# Altium PCB 矩形板V3.0.pcbdoc (part 1 of 2)
Units mm, origin at the board's own origin, x right, y up, seen from the top; angles counter-clockwise.
Board outline 153.8 x 190.94 mm, 2 copper layers (Top Layer, Bottom Layer); 146 components, 210 nets, 672 pads, 247 vias.
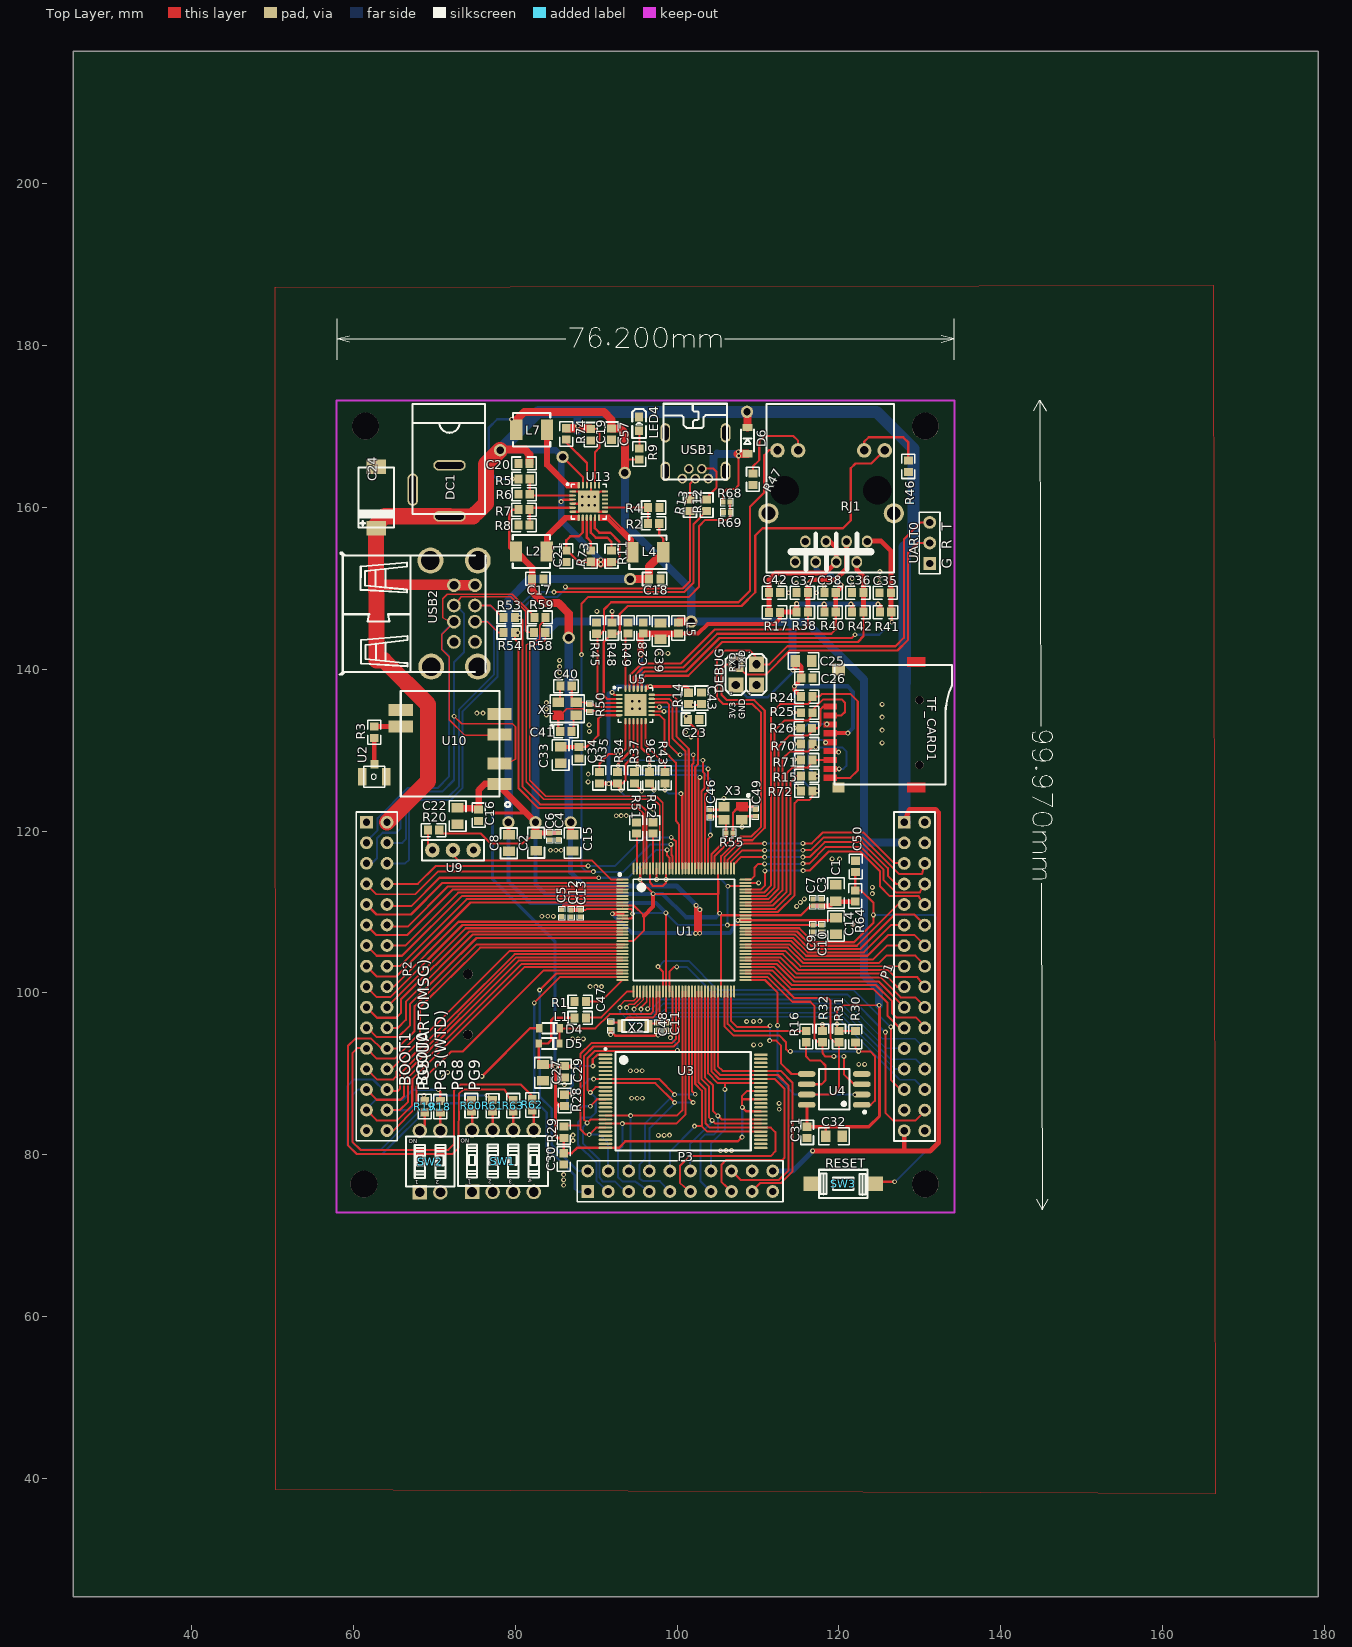
[diagram p0: Top Layer view]
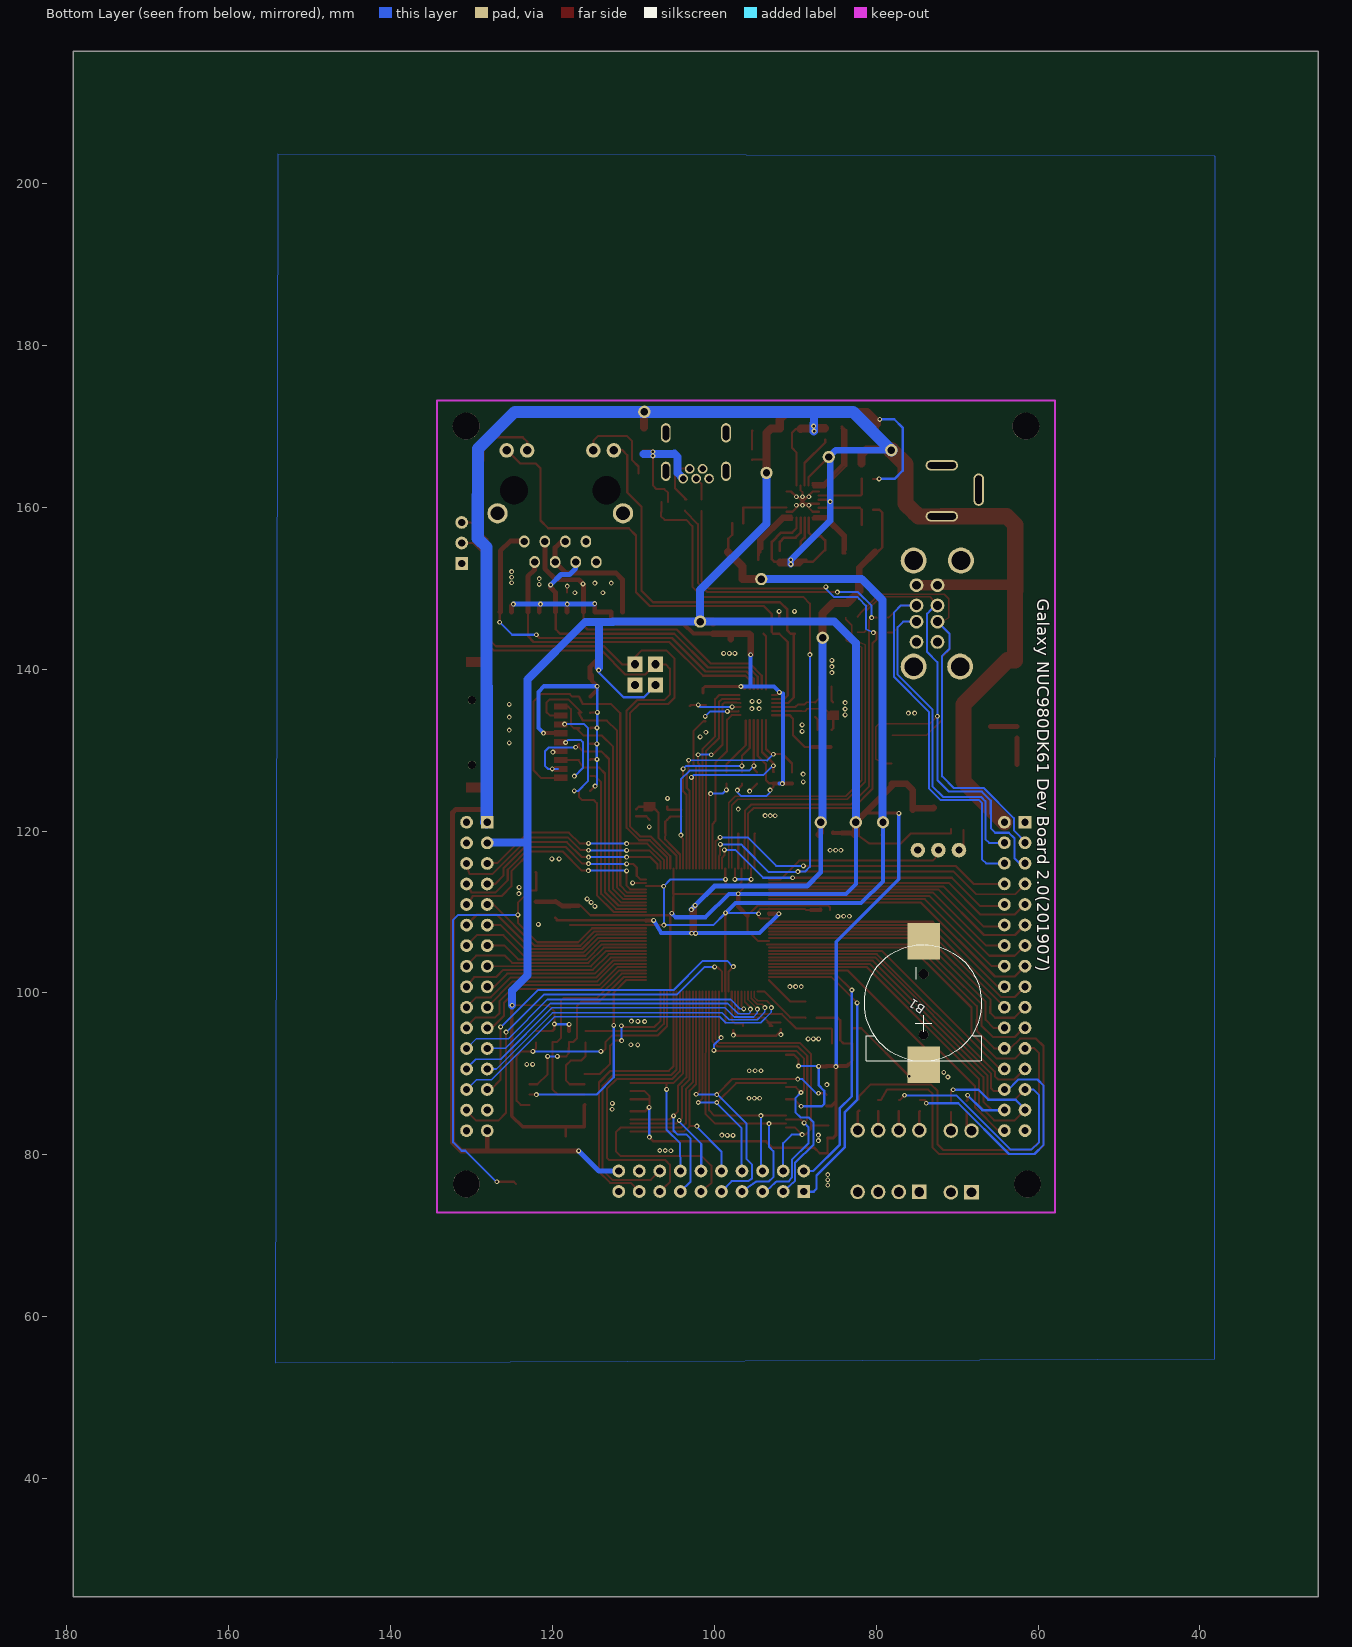
[diagram p1: Bottom Layer view, seen from below]

## Layer stack, top to bottom
Top Layer: signal copper (thickness not stored)
Dielectric: dielectric 0.32, FR-4, Dk 4.8
Bottom Layer: signal copper (thickness not stored)

## Board outline
179.197,25.4 25.4,25.4 25.4,216.338 179.197,216.338

## Components (designator, comment, footprint, x,y, rotation, side; value= is the part's Value field where it differs from the comment)
B1 "CR1220-2" BATTERY-2 74.141,98.749 r270 bottom
C1 "10uF" 0805 119.617,112.328 r270 top
C2 "10uF" 0805 82.583,118.56 r90 top
C3 "100nF" 0402 117.801,111.189 r270 top
C4 "100nF" 0402 85.341,119.369 r90 top
C5 "100nF" 0402 85.721,109.849 r90 top
C6 "100nF" 0402 84.261,119.349 r90 top
C7 "100nF" 0402 116.781,111.189 r270 top
C8 "10uF" 0805 79.221,118.505 r90 top
C9 "100nF" 0402 116.781,107.969 r90 top
C10 "100nF" 0402 117.861,107.969 r90 top
C11 "100nF" 0402 98.681,95.849 r90 top
C12 "100nF" 0402 86.901,109.829 r90 top
C13 "100nF" 0402 88.061,109.829 r90 top
C14 "10uF" 0805 119.641,108.269 r90 top
C15 "10uF" 0805 87.081,118.549 r90 top
C16 "100nF" 0603 75.481,121.959 r90 top
C17 "10uF" 0603 82.797,151.151 r180 top
C18 "22uF" 0603 97.227,151.141 r180 top
C19 "10uF" 0603 89.327,168.971 r90 top
C20 "10uF" 0603 81.089,165.418 r0 top
C21 "10uF" 0603 86.307,153.961 r90 top
C22 "10uF" 0805 72.881,121.849 r90 top
C23 "15pF" 0603 102.041,133.789 r180 top
C24 "470uF" CAP-T7343-D 62.811,161.199 r90 top
C25 "10uF" 0805 115.621,141.009 r180 top
C26 "100nF" 0603 116.041,138.889 r180 top
C27 "10uF" 0805 83.444,90.143 r90 top
C28 "100nF" 0603 95.821,145.089 r270 top
C29 "100nF" 0603 86.111,90.27 r270 top
C30 "100nF" 0603 86.001,79.489 r90 top
C31 "100nF" 0603 116.061,82.769 r270 top
C32 "10uF" 0805 119.391,82.293 r0 top
C33 "10uF" 0805 85.617,129.378 r270 top
C34 "100nF" 0603 87.867,129.678 r270 top
C35 "10pF" 0603 125.722,149.445 r180 top
C36 "10pF" 0603 122.33,149.456 r180 top
C37 "10pF" 0603 115.472,149.456 r180 top
C38 "10pF" 0603 118.901,149.456 r180 top
C39 "10uF" 0805 97.961,144.689 r270 top
C40 "22pF" 0603 86.281,137.909 r180 top
C41 "22pF" 0603 86.261,132.309 r180 top
C42 "22nF" 0603 112.043,149.456 r0 top
C43 "100nF" 0603 103.018,136.416 r270 top
C46 "15pF" 0402 104.081,122.209 r270 top
C47 "15pF" 0402 91.801,95.929 r90 top
C48 "15pF" 0402 97.641,95.839 r90 top
C49 "15pF" 0402 109.681,122.249 r90 top
C50 "1uF" 0603 122.067,115.628 r270 top
C57 "10uF" 0603 91.907,169.041 r90 top
D4 "1N4148WS T4" SOD-323 84.261,95.629 r0 top
D5 "1N4148WS T4" SOD-323 84.201,93.749 r0 top
D6 "DSK14" SOD-123 108.691,168.239 r270 top
DC1 "DC005-2.5MM" DC-5020 69.611,162.029 r270 top
DEBUG "4pin2x2" 4PINO 109.801,140.599 r270 top
L1 "0Ω" 0603 88.022,96.909 r0 top
L2 "1.5uH" L-SMD-4.1X4.6 81.997,154.531 r0 top
L4 "1uH" L-SMD-4.1X4.6 96.387,154.451 r180 top
L5 "0Ω" 0603 100.161,145.089 r270 top
L7 "1.5uH" L-SMD-4.1X4.6 82.027,169.581 r0 top
LED4 "KT-0603R" LED-0603 95.321,170.309 r270 top
P1 "Header-Female-2.54_2x16" HDR-16X2/2.54 130.601,100.759 r270 top
P2 "Header-Female-2.54_2x16" HDR-16X2/2.54 64.161,100.769 r270 top
P3 "Header-Female-2.54_2x10" HDR-10X2/2.54 100.381,76.729 r0 top
R1 "0" 0603 88.021,98.929 r0 top
R2 "100K" 0603 97.097,158.011 r0 top
R3 "0" 0603 62.581,132.209 r90 top
R4 "100K" 0603 97.107,159.971 r180 top
R5 "510K" 0603 81.097,163.511 r180 top
R6 "110K" 0603 81.097,161.606 r0 top
R7 "200K" 0603 81.089,159.703 r180 top
R8 "100K" 0603 81.089,157.798 r0 top
R9 "1K" 0603 95.321,166.579 r90 top
R11 "1K" 0603 91.897,153.951 r90 top
R12 "27" 0603 103.641,160.259 r270 top
R13 "27" 0603 101.591,160.259 r270 top
R14 "33" 0603 101.401,136.389 r90 top
R15 "0" 0603 116.021,126.819 r0 top
R16 "0" 0603 115.961,94.609 r90 top
R17 "0" 0603 112.031,147.019 r0 top
R18 "10K" 0603 70.751,85.949 r270 top
R19 "10K" 0603 68.821,85.959 r270 top
R20 "10K" 0603 69.911,120.109 r0 top
R24 "10K" 0603 116.021,136.599 r180 top
R25 "10K" 0603 116.021,134.619 r180 top
R26 "10K" 0603 115.981,132.699 r180 top
R28 "100K" 0603 86.111,86.714 r270 top
R29 "100K" 0603 86.017,82.778 r90 top
R30 "10K" 0603 122.021,94.589 r90 top
R31 "10K" 0603 120.001,94.609 r90 top
R32 "10K" 0603 117.961,94.609 r90 top
R34 "4.7K" 0603 92.661,126.589 r90 top
R35 "4.7K" 0603 90.401,126.569 r90 top
R36 "4.7K" 0603 96.581,126.589 r90 top
R37 "4.7K" 0603 94.721,126.569 r90 top
R38 "49.9" 0603 115.472,147.043 r180 top
R40 "49.9" 0603 118.901,147.043 r180 top
R41 "49.9" 0603 125.759,147.043 r180 top
R42 "49.9" 0603 122.33,147.043 r180 top
R43 "510" 0603 98.501,126.589 r90 top
R45 "10K" 0603 90.06,145.08 r270 top
R46 "470" 0603 128.571,165.059 r90 top
R47 "470" 0603 109.371,163.459 r90 top
R48 "10K" 0603 91.965,145.08 r270 top
R49 "12.1K" 0603 93.921,145.089 r270 top
R50 "1M" 0402 89.217,135.228 r90 top
R51 "12.1K" 0603 94.971,120.379 r270 top
R52 "12.1K" 0603 97.041,120.383 r270 top
R53 "4.7" 0603 79.251,146.389 r0 top
R54 "4.7" 0603 79.251,144.529 r0 top
R55 "1M" 0402 106.476,119.767 r180 top
R58 "4.7" 0603 83.011,144.549 r0 top
R59 "4.7" 0603 83.061,146.389 r0 top
R60 "10K" 0603 74.591,86.079 r270 top
R61 "10K" 0603 77.201,86.059 r270 top
R62 "10K" 0603 82.101,86.159 r270 top
R63 "10K" 0603 79.761,86.079 r270 top
R64 "100K" 0603 122.017,111.978 r270 top
R68 "20K" 0402 106.121,160.649 r180 top
R69 "39K" 0402 106.161,159.399 r0 top
R70 "10K" 0603 116.021,130.759 r180 top
R71 "10K" 0603 116.021,128.779 r180 top
R72 "10K" 0603 116.021,124.959 r180 top
R73 "1K" 0603 89.337,153.971 r90 top
R74 "1K" 0603 86.307,169.061 r90 top
RJ1 "HR911105A" RJ45-LIGHT 119.031,160.129 r180 top
SW1 "NDI-04H-V" NDI-04H-V 78.481,79.219 r0 top
SW2 "NDI-02H-V" NDI-02H-V 69.491,79.169 r0 top
SW3 "RESET" KEY-TOUCH-SMD-6.0*3.5*H-(A) 120.511,76.399 r0 top
TF_CARD1 "TF_CARD" TF-115_MRS 118.951,126.579 r0 top
U1 "NUC980DK61Y" LQFP-128_14X14X04P 100.841,107.789 r0 top
U2 "IPEX座-3P-φ2" IPEX座-3P-Φ2 63.921,125.409 r90 top
U3 "MT29F2G08ABAEAWP-IT:E" TSOP-48 100.751,86.609 r90 top
U4 "W25Q128JVSIQTR" SOIC-8_208MIL 119.411,88.079 r180 top
U5 "LAN8720AI" QFN-24_4X4X05P 94.861,135.589 r0 top
U9 "3pin插针" 3PIN插针 74.851,117.649 r180 top
U10 "usb wifi" "RTL8188CUS USB WIFI" 78.061,124.289 r180 top
U13 "EA3059C" QFN-24_4X4X05P 89.091,160.719 r0 top
UART0 "2.54排针 3pin" HDR-3X1/2.54 131.211,155.589 r90 top
USB1 "Mini USB-B 5P-Female-TH_C46398" USB-MINI-2 102.271,166.369 r180 top
USB2 "Double layer DIP 90° black" USB-M-51 72.451,146.869 r270 top
X1 "25MHz" OSC-YSX-3225_4P 86.421,135.109 r0 top
X2 "32.768KHz" SMD-3215_2P 94.801,95.909 r0 top
X3 "12MHz" OSC-YSX-3225_4P 106.901,122.209 r180 top
? "" ? 96.061,180.761 r0 top
? "" ? 145.141,123.219 r0 top

## Footprints (in the part's own frame and the unit in brackets; to place one, negate y for a bottom-side part, rotate by r counter-clockwise, add the part's x,y. Pads: shape width x height; smd on the part's side, far side on the other; paste and mask are expansions set on the pad)
3PIN插针 [mm]
  round 1.8 hole 0.9: 1(0,0) 2(2.54,0) 3(5.08,0)
  silkscreen extent -1.27,-1.27 6.35,1.27
4PINO [mil]
  rect 74x74 hole 40: a(0,0) b(100,0) c(0,-100) d(100,-100)
  silkscreen extent -50,-150 150,50
0402 [mm]
  rect 0.6x0.65 smd: 1(-0.424,0) 2(0.424,0)
  silkscreen extent -0.82,-0.43 0.81,0.43
0603 [mm]
  rect 1x1.1 smd: 1(-0.7,0) 2(0.7,0)
  silkscreen extent -1.5,-0.8 1.5,0.8
0805 [mm]
  rect 1.16x1.45 smd: 1(-1.016,0) 2(1.016,0)
  silkscreen extent -1.9,-1.03 1.87,1.04
BATTERY-2 [mm]
  round 1.2 hole 1.2: 0(-3.581,0) 0(3.912,0)
  rect 4.5x4 smd: 1(7.62,0) 2(-7.62,0)
  silkscreen extent -7.22,-7.3 7.22,7.14
CAP-T7343-D [mm]
  rect 1.8x2.4 smd: 1(-3.81,0) 2(3.81,0)
  silkscreen extent -3.7,-2.2 3.7,2.2
DC-5020 [mm]
  oval 1.3x3.999 hole 0.8 slot 3.5 at 90 deg copper offset 0,0: 1(3.15,2.275) 2(-3.15,2.275)
  oval 3.999x1.3 hole 0.8 slot 3.5 at 0 deg copper offset 0,0: 3(-0.15,-2.275)
  silkscreen extent -10.75,-2.28 2.85,6.67
HDR-3X1/2.54 [mil]
  rect 62x62 hole 35: 1(-100,0)
  round 62 hole 35: 2(0,0) 3(100,0)
  silkscreen extent -150,-50 150,50
HDR-10X2/2.54 [mil]
  rect 62x62 hole 35: 1(-450,-50)
  round 62 hole 35: 2(-450,50) 3(-350,-50) 4(-350,50) 5(-250,-50) 6(-250,50) 7(-150,-50) 8(-150,50) 9(-50,-50) 10(-50,50) 11(50,-50) 12(50,50) 13(150,-50) 14(150,50) 15(250,-50) 16(250,50) 17(350,-50) 18(350,50) 19(450,-50) 20(450,50)
  silkscreen extent -500,-100 500,100
HDR-16X2/2.54 [mil]
  rect 62x62 hole 35: 1(-800,-100)
  round 62 hole 35: 2(-800,0) 3(-700,-100) 4(-700,0) 5(-600,-100) 6(-600,0) 7(-500,-100) 8(-500,0) 9(-400,-100) 10(-400,0) 11(-300,-100) 12(-300,0) 13(-200,-100) 14(-200,0) 15(-100,-100) 16(-100,0) 17(0,-100) 18(0,0) 19(100,-100) 20(100,0) 21(200,-100) 22(200,0) 23(300,-100) 24(300,0) 25(400,-100) 26(400,0) 27(500,-100) 28(500,0) 29(600,-100) 30(600,0) 31(700,-100) 32(700,0)
  silkscreen extent -850,-150 750,50
IPEX座-3P-Φ2 [mm]
  rect 2.2x1.049 smd: 1(1.3,2.8) 2(1.3,-0.149)
  rect 1.049x1.001 smd: 3(2.83,1.33)
  silkscreen extent 0,0.03 2.6,2.63
KEY-TOUCH-SMD-6.0*3.5*H-(A) [mm]
  rect 1.8x1.8 smd: 1(-4,0) 2(4,0)
  silkscreen extent -3,-1.75 3,1.75
L-SMD-4.1X4.6 [mm]
  rect 1.5x2.5 smd: 1(-1.9,0) 2(1.9,0)
  silkscreen extent -2.3,-2.05 2.3,2.05
LED-0603 [mil]
  rect 43x39 smd: 1(33.5,0) 2(-33.5,0)
  silkscreen extent -72,-34 70,34
LQFP-128_14X14X04P [mm]
  oval 1.5x0.25 smd: 1(-7.6,6.2) 2(-7.6,5.799) 3(-7.6,5.4) 4(-7.6,5.001) 5(-7.6,4.6) 6(-7.6,4.201) 7(-7.6,3.8) 8(-7.6,3.401) 9(-7.6,3) 10(-7.6,2.601) 11(-7.6,2.2) 12(-7.6,1.801) 13(-7.6,1.4) 14(-7.6,1.001) 15(-7.6,0.599) 16(-7.6,0.201) 17(-7.6,-0.201) 18(-7.6,-0.599) 19(-7.6,-1.001) 20(-7.6,-1.4) 21(-7.6,-1.801) 22(-7.6,-2.2) 23(-7.6,-2.601) 24(-7.6,-3) 25(-7.6,-3.401) 26(-7.6,-3.8) 27(-7.6,-4.201) 28(-7.6,-4.6) 29(-7.6,-5.001) 30(-7.6,-5.4) 31(-7.6,-5.799) 32(-7.6,-6.2) 65(7.6,-6.2) 66(7.6,-5.799) 67(7.6,-5.4) 68(7.6,-5.001) 69(7.6,-4.6) 70(7.6,-4.201) 71(7.6,-3.8) 72(7.6,-3.401) 73(7.6,-3) 74(7.6,-2.601) 75(7.6,-2.2) 76(7.6,-1.801) 77(7.6,-1.4) 78(7.6,-1.001) 79(7.6,-0.599) 80(7.6,-0.201) 81(7.6,0.201) 82(7.6,0.599) 83(7.6,1.001) 84(7.6,1.4) 85(7.6,1.801) 86(7.6,2.2) 87(7.6,2.601) 88(7.6,3) 89(7.6,3.401) 90(7.6,3.8) 91(7.6,4.201) 92(7.6,4.6) 93(7.6,5.001) 94(7.6,5.4) 95(7.6,5.799) 96(7.6,6.2)
  oval 0.25x1.5 smd: 33(-6.2,-7.6) 34(-5.799,-7.6) 35(-5.4,-7.6) 36(-5.001,-7.6) 37(-4.6,-7.6) 38(-4.201,-7.6) 39(-3.8,-7.6) 40(-3.401,-7.6) 41(-3,-7.6) 42(-2.601,-7.6) 43(-2.2,-7.6) 44(-1.801,-7.6) 45(-1.4,-7.6) 46(-1.001,-7.6) 47(-0.599,-7.6) 48(-0.201,-7.6) 49(0.201,-7.6) 50(0.599,-7.6) 51(1.001,-7.6) 52(1.4,-7.6) 53(1.801,-7.6) 54(2.2,-7.6) 55(2.601,-7.6) 56(3,-7.6) 57(3.401,-7.6) 58(3.8,-7.6) 59(4.201,-7.6) 60(4.6,-7.6) 61(5.001,-7.6) 62(5.4,-7.6) 63(5.799,-7.6) 64(6.2,-7.6) 97(6.2,7.6) 98(5.799,7.6) 99(5.4,7.6) 100(5.001,7.6) 101(4.6,7.6) 102(4.201,7.6) 103(3.8,7.6) 104(3.401,7.6) 105(3,7.6) 106(2.601,7.6) 107(2.2,7.6) 108(1.801,7.6) 109(1.4,7.6) 110(1.001,7.6) 111(0.599,7.6) 112(0.201,7.6) 113(-0.201,7.6) 114(-0.599,7.6) 115(-1.001,7.6) 116(-1.4,7.6) 117(-1.801,7.6) 118(-2.2,7.6) 119(-2.601,7.6) 120(-3,7.6) 121(-3.401,7.6) 122(-3.8,7.6) 123(-4.201,7.6) 124(-4.6,7.6) 125(-5.001,7.6) 126(-5.4,7.6) 127(-5.799,7.6) 128(-6.2,7.6)
  silkscreen extent -8.07,-6.25 6.25,7
NDI-02H-V [mm]
  rect 1.8x1.8 hole 1.2: 1(-1.27,-3.81)
  round 1.8 hole 1.2: 2(1.27,-3.81) 3(1.27,3.81) 4(-1.27,3.81)
  silkscreen extent -3.01,-3.1 3.01,3.1
NDI-04H-V [mm]
  rect 1.8x1.8 hole 1.2: 1(-3.81,-3.81)
  round 1.8 hole 1.2: 2(-1.27,-3.81) 3(1.27,-3.81) 4(3.81,-3.81) 5(3.81,3.81) 6(1.27,3.81) 7(-1.27,3.81) 8(-3.81,3.81)
  silkscreen extent -5.55,-3.1 5.55,3.1
OSC-YSX-3225_4P [mm]
  round 0 smd: 1(-1.1,-0.8)
  rect 1.4x1.15 smd: 2(1.1,-0.8) 3(1.1,0.8) 4(-1.1,0.8)
  Top Layer region: -1.8,-0.225 -0.762,-0.225 -0.4,-0.604 -0.4,-1.375 -1.8,-1.375
  silkscreen extent -2.1,-2.35 2.1,1.7
QFN-24_4X4X05P [mm]
  oval 0.796x0.28 smd: 1(-2,1.232) 2(-2,0.732) 3(-2,0.231) 4(-2,-0.267) 5(-2,-0.767) 6(-2,-1.267) 13(2,-1.257) 14(2,-0.757) 15(2,-0.257) 16(2,0.241) 17(2,0.742) 18(2,1.242)
  oval 0.28x0.796 smd: 7(-1.245,-2) 8(-0.744,-2) 9(-0.244,-2) 10(0.254,-2) 11(0.754,-2) 12(1.255,-2) 19(1.27,2) 20(0.77,2) 21(0.269,2) 22(-0.229,2) 23(-0.729,2) 24(-1.229,2)
  rect 2.68x2.68 smd: 25(0,-0.013)
  silkscreen extent -2.84,-2.16 2.15,2.35
RJ45-LIGHT [mm]
  oval 1.3x1.499 hole 0.914 copper offset 0,0: 1(-4.445,4.355) 2(-3.175,6.895) 3(-1.905,4.355) 4(-0.635,6.895) 5(0.635,4.355) 6(1.905,6.895) 7(3.175,4.355) 8(4.445,6.895)
  round 1.8 hole 1.04: 9(-6.625,-6.895) 10(-4.085,-6.895) 11(4.085,-6.895) 12(6.625,-6.895)
  round 2.5 hole 1.702: 13(-7.75,0.875) 14(7.75,0.875)
  round 2 hole 3.5 unplated: 15(5.715,-1.995) 16(-5.715,-1.995)
  silkscreen extent -7.78,-12.65 7.96,8.18
"RTL8188CUS USB WIFI" [mm]
  rect 3x1.5 smd: 1(0,-1.524) 2(0,-4.064) 3(0,-7.62) 4(0,-10.16) 5(12.192,-10.668) 6(12.192,-8.636)
  silkscreen extent -1.32,-13 12.2,1.32
SMD-3215_2P [mm]
  rect 1x1.524 smd: 1(-1.648,0.024) 2(1.648,-0.024)
  silkscreen extent -1.6,-0.75 1.6,0.75
SOD-123 [mil]
  rect 35.8x48 smd: 1(64,0) 2(-64,0)
  silkscreen extent -53,-31 53,31
SOD-323 [mm]
  rect 0.8x1 smd: 1(-1.27,0) 2(1.27,0)
  silkscreen extent -0.89,-0.66 0.89,0.66
SOIC-8_208MIL [mm]
  oval 2.2x0.7 smd: 1(-3.4,1.905) 2(-3.4,0.635) 3(-3.4,-0.635) 4(-3.4,-1.905) 5(3.4,-1.905) 6(3.4,-0.635) 7(3.4,0.635) 8(3.4,1.905)
  silkscreen extent -3.9,-2.5 1.9,2.95
TF-115_MRS [mm]
  round 0 smd: 1(0,8.8) 2(0,7.7) 3(0,6.6) 4(0,5.5) 5(0,4.4) 6(0,3.3) 7(0,2.2) 8(0,1.1) 9(0,0) 11(10.6,-1.2) 12(10.6,14.3)
  rect 1.5x1.2 smd: 10(1,-1.2)
  rect 1.6x1.5 smd: 13(1,13.4)
  round 1 hole 1 unplated: ""(11,1.6) ""(11,9.6)
  Top Layer region: -0.8,-0.351 -0.8,0.351 0.8,0.351 0.8,-0.351
  Top Layer region: -0.8,0.749 -0.8,1.45 0.8,1.45 0.8,0.749
  Top Layer region: -0.8,1.849 -0.8,2.55 0.8,2.55 0.8,1.849
  Top Layer region: -0.8,2.949 -0.8,3.65 0.8,3.65 0.8,2.949
  Top Layer region: -0.8,4.049 -0.8,4.75 0.8,4.75 0.8,4.049
  Top Layer region: -0.8,5.151 -0.8,5.85 0.8,5.85 0.8,5.151
  Top Layer region: -0.8,6.251 -0.8,6.949 0.8,6.949 0.8,6.251
  Top Layer region: -0.8,7.351 -0.8,8.049 0.8,8.049 0.8,7.351
  Top Layer region: -0.8,8.451 -0.8,9.149 0.8,9.149 0.8,8.451
  Top Layer region: 9.499,13.701 9.499,14.9 11.699,14.9 11.699,13.701
  Top Layer region: 9.499,-1.801 9.499,-0.6 11.699,-0.6 11.699,-1.801
  silkscreen extent 0.5,-0.82 15,13.92
TSOP-48 [mm]
  oval 0.28x1.696 smd: 1(5.75,9.6) 2(5.25,9.6) 3(4.75,9.6) 4(4.25,9.6) 5(3.75,9.6) 6(3.25,9.6) 7(2.75,9.6) 8(2.25,9.6) 9(1.75,9.6) 10(1.25,9.6) 11(0.75,9.6) 12(0.25,9.6) 13(-0.25,9.6) 14(-0.75,9.6) 15(-1.25,9.6) 16(-1.75,9.6) 17(-2.25,9.6) 18(-2.75,9.6) 19(-3.25,9.6) 20(-3.75,9.6) 21(-4.25,9.6) 22(-4.75,9.6) 23(-5.25,9.6) 24(-5.75,9.6) 25(-5.75,-9.6) 26(-5.25,-9.6) 27(-4.75,-9.6) 28(-4.25,-9.6) 29(-3.75,-9.6) 30(-3.25,-9.6) 31(-2.75,-9.6) 32(-2.25,-9.6) 33(-1.75,-9.6) 34(-1.25,-9.6) 35(-0.75,-9.6) 36(-0.25,-9.6) 37(0.25,-9.6) 38(0.75,-9.6) 39(1.25,-9.6) 40(1.75,-9.6) 41(2.25,-9.6) 42(2.75,-9.6) 43(3.25,-9.6) 44(3.75,-9.6) 45(4.25,-9.6) 46(4.75,-9.6) 47(5.25,-9.6) 48(5.75,-9.6)
  silkscreen extent -6.1,-8.35 6.58,9.72
USB-M-51 [mm]
  round 3.2 hole 2.3: 0(-6.551,-2.925) 0(-6.551,2.925) 0(6.551,-2.826) 0(6.551,2.925)
  round 1.7 hole 1.1: 1(-3.5,2.574) 2(-1.001,2.574) 3(1.001,2.574) 4(3.5,2.574) 5(-3.5,-0.027) 6(-1.001,-0.027) 7(1.001,-0.027) 8(3.5,-0.027)
  silkscreen extent -7.52,-14.13 7.54,3.87
USB-MINI-2 [mm]
  oval 1.2x2.4 hole 0.8 slot 1.8 at 90 deg copper offset 0,0: 0(-3.72,-2.826) 0(-3.72,1.924) 0(3.72,-2.826) 0(3.72,1.924)
  round 1.2 hole 0.8: 1(-1.58,2.826) 2(-0.78,1.622) 3(0.02,2.826) 4(0.82,1.622) 5(1.62,2.826)
  silkscreen extent -3.89,-6.42 3.96,2.93
? [mm]
  silkscreen extent -38.1,-2.51 38.1,2.51

## Free pads (board coordinates)
  round 1.524 hole 0.914: 1(78.127,167.051) 1(85.857,166.211) 2(86.611,143.879) 2(93.547,164.251) 2(94.197,151.132) 2(101.751,145.879) 4(79.161,121.089) 4(82.511,121.079) 4(86.85,121.069) 5(108.641,171.789)
  round 3.302 hole 3.302 unplated: ""(61.311,76.389) ""(61.501,170.029) ""(130.651,76.389) ""(130.671,170.029)

## Via types
v1: diameter 0.61, hole 0.305, Top Layer to Bottom Layer, 247 vias

## Nets (pads, with @x,y where several pads share a name; then routed paths per layer and width w, separated by ;. In a path a pad name is that pad's centre, name@x,y a point inside that pad or via, vN(x,y) a via of type N, cw(c..) or ccw(c..) an arc to the next point about the centre after c; other vN are vias at no path point)
1.2V: C8.2 C9.2 C10.2 C11.2 C12.2 C13.2 C18.2 L4.1 pad.2@94.197,151.132 pad.4@79.161,121.089 R2.2 U1.10 U1.13 U1.43 U1.82 U1.94 U1.118 U1.123 | length 152.2
  Top Layer w0.25: U1.43@98.643,100.196 98.643,96.311 C11.2@98.681,96.273
  Top Layer w0.254: C13.2@88.061,110.253 88.684,110.253 88.821,110.39 91.801,110.39 U1.10@93.241,110.39
  Top Layer w0.26: U1.13@93.243,109.195 94.335,109.195 94.516,109.378 v1(94.516,109.778) 94.516,110.143 94.318,110.376 U1.10@93.243,110.397 ; U1.123@96.642,115.395 96.642,113.645 97.001,113.208 98.235,113.208 98.621,113.609 v1@98.616,114.028 ; v1@98.617,109.878 98.643,109.851 U1.43@98.643,100.196 ; v1(98.617,114.028) 98.643,114.054 U1.118@98.643,115.395 ; v1(106.217,108.378) 106.234,108.395 106.499,108.395 108.442,108.395 116.779,108.395 C9.2@116.781,108.393 ; v1(106.267,113.178) 106.285,113.196 U1.94@108.442,113.196 ; C9.2@116.66,108.41 C10.2@117.811,108.41
  Top Layer w0.28: R2.2@97.797,158.011 97.797,156.591 98.287,156.101 L4.1@98.287,154.451
  Top Layer w0.5: pad.4@79.161,121.089 79.161,119.581 C8.2@79.221,119.521 ; C12.2@86.901,110.273 86.921,110.253 C13.2@88.061,110.253
  Top Layer w1: pad.2@94.197,151.131 96.517,151.131 C18.2@96.527,151.141 96.527,152.691 L4.1@98.287,154.451
  Bottom Layer w0.26: v1(94.516,109.778) 94.616,109.878 v1@98.617,109.878 ; v1@98.616,109.878 100.112,108.377 v1@106.216,108.377 ; v1(98.617,114.028) 105.417,114.029 v1(106.267,113.178) ; v1(106.217,108.378) 106.217,113.128 v1(106.267,113.178)
  Bottom Layer w0.5: pad.4@79.161,121.089 79.161,113.788 81.86,111.089 96.901,111.089 97.404,111.089 v1@98.616,109.878
  Bottom Layer w1: pad.4@79.16,121.089 79.205,121.133 79.205,148.524 81.789,151.13 pad.2@94.196,151.13
  other v1: 98.617,109.878
1.8V: C14.2 C15.2 C17.2 L2.1 pad.2@86.611,143.879 pad.4@86.85,121.069 R7.2 U1.11 U1.12 U1.83 U1.84 | length 108
  Top Layer w0.26: U1.12@93.241,109.59 93.243,109.592 U1.12@93.243,109.596 ; U1.83@108.44,108.79 108.44,108.794 U1.83@108.443,108.796
  Top Layer w0.3: L2.1@80.097,154.531 79.787,154.531 79.247,155.031 79.253,159.339 79.604,159.695 R7.2@80.389,159.695 ; v1(107.501,108.969) 119.458,108.969 119.458,109.102 C14.2@119.641,109.285
  Top Layer w0.5: v1(92.017,109.778) 93.026,109.778 93.243,109.789 ; v1(102.301,107.349) 102.361,107.409 v1(102.361,110.809) ; v1(102.801,107.369) 102.821,107.389 v1(102.821,110.289) ; v1(107.501,108.969) 108.439,108.969 108.443,108.965
  Top Layer w0.8: L2.1@80.097,154.531 82.097,152.531 C17.2@82.097,151.151 ; pad.4@86.85,121.069 86.851,119.795 C15.2@87.081,119.565
  Top Layer w1: C17.2@82.096,151.15 82.096,149.631 83.561,148.168 85.339,148.168 86.609,146.898 pad.2@86.609,143.878
  Bottom Layer w0.5: v1@92.017,109.769 94.417,107.379 106.561,107.409 v1(107.501,108.969)
  Bottom Layer w0.6: pad.4@86.85,121.069 86.851,114.897 88.54,113.208 99.96,113.208 102.36,110.808 102.393,110.757 102.86,110.289 v1@102.82,110.289
  Bottom Layer w1: pad.2@86.611,143.879 86.611,121.309 pad.4@86.85,121.069
3.3V: C1.2 C2.2 C3.2 C4.2 C5.2 C6.2 C7.2 C16.2 C22.2 C25.2 C26.2 C27.2 C29.1 C30.2 C31.1 C32.1 C57.2 D5.1 DEBUG.d L1.1 L5.1 L7.1 P1.3 pad.2@93.547,164.251 pad.2@101.751,145.879 pad.4@82.511,121.079 R5.2 R9.1 R20.2 R24.2 R25.2 R26.2 R28.2 R29.1 R30.2 R31.2 R32.2 R64.2 R70.2 R71.2 R72.2 TF_CARD1.4 U1.9 U1.20 U1.60 U1.85 U1.102 U1.121 U1.126 U3.1 U3.12 U3.24 U3.34 U3.37 U3.39 U4.8 U10.1 | length 521
  Top Layer w0.25: C5.2@85.721,110.273 85.721,110.589 85.921,110.789 U1.9@93.241,110.789 ; v1(108.061,85.849) 108.031,85.879 108.031,87.279 108.611,87.859 U3.39@110.351,87.859 ; v1(119.761,96.159) 119.762,97.709 120.506,98.456 v1(124.971,98.479) ; R31.2@120.001,95.309 122.001,95.309 R30.2@122.021,95.289
  Top Layer w0.254: R20.2@70.78,120.259 70.78,119.69 75.731,119.69 76.96,118.458 80.859,118.458 82.363,119.545 C2.2@82.652,119.545 ; v1(79.557,170.871) 79.557,170.151 L7.1@80.127,169.581 ; v1@79.647,163.511 R5.2@80.397,163.511 ; U1.85@108.443,109.596 115.309,109.596 116.477,110.764 C7.2@116.78,110.764
  Top Layer w0.26: U1.20@93.244,106.396 94.585,106.396 95.921,107.732 95.921,109.53 94.649,110.795 U1.9@93.244,110.795 ; U1.126@95.444,115.395 v1(95.444,114.029) 95.444,113.878 97.087,112.23 105.083,112.23 U1.102@105.045,115.395 ; U1.121@97.44,115.388 97.44,114.059 v1(97.461,114.039) ; 105.064,113.826 105.067,110.028 v1(105.254,109.842) 105.499,109.596 U1.85@108.443,109.596 ; U1.60@105.443,100.196 105.443,109.541 105.498,109.596
  Top Layer w0.28: v1(89.281,85.999) 90.13,86.858 U3.12@91.151,86.859 ; v1(89.591,90.969) 89.591,91.789 90.161,92.359 U3.1@91.151,92.359 ; 93.757,167.401 93.483,167.401 93.782,165.898 R9.1@95.321,165.879
  Top Layer w0.3: C27.2@83.444,91.159 82.931,91.672 D5.1@82.931,93.749 83.901,93.749 84.041,93.749 84.441,94.149 84.441,96.609 84.741,96.909 L1.1@87.321,96.909 ; R29.1@86.017,82.078 86.017,80.205 C30.2@86.001,80.189 86.963,80.189 87.633,80.859 U3.24@91.151,80.859 92.802,80.858 93.6,81.659 107.501,81.659 v1(108.031,82.189) ; v1(108.061,85.849) 108.551,85.359 U3.34@110.351,85.359 ; 108.061,86.859 108.92,86.859 U3.37@110.351,86.859 ; v1(114.441,134.649) 115.291,134.649 R25.2@115.321,134.619 ; v1(114.491,128.849) 115.251,128.849 R71.2@115.321,128.779 ; v1(114.491,132.739) 115.241,132.739 R26.2@115.281,132.699 ; v1(114.501,130.769) 115.311,130.769 R70.2@115.321,130.759 ; v1(114.721,125.559) R72.2@115.321,124.959 ; C32.1@118.375,82.293 118.375,83.47 ; v1(119.761,96.159) 119.761,95.549 R31.2@120.001,95.309
  Top Layer w0.4: v1(77.201,122.189) 77.201,122.22 81.4,122.22 82.51,121.11 pad.4@82.51,121.079 ; v1@85.036,90.97 v1(84.968,90.901) 84.968,86.587 ; R29.1@85.984,82.077 85.287,82.077 84.968,82.396 84.968,86.587 ; R28.2@86.111,86.014 85.541,86.014 84.968,86.587 ; U4.8@116.011,86.174 116.061,86.124 C31.1@116.061,83.469 123.691,83.47 125.012,84.788 125.012,98.478 v1(124.971,98.479)
  Top Layer w0.5: C27.2@83.444,91.159 83.633,90.97 C29.1@86.111,90.97 86.153,90.928 v1(87.117,90.928) ; C6.2@84.261,119.773 85.321,119.773 C4.2@85.341,119.793 ; 95.921,109.53 97.041,110.65 v1(97.041,112.248) ; v1(114.301,139.889) 114.605,140.193 C25.2@114.605,141.009 ; C26.2@115.121,139.248 115.121,138.529 v1(114.481,137.889) 114.481,137.439 R24.2@115.321,136.599 ; v1(117.941,96.109) 117.941,95.329 R32.2@117.961,95.309 ; 119.321,132.089 119.331,132.099 v1(121.101,132.099)
  Top Layer w0.6: C2.2@82.583,119.576 82.78,119.773 C6.2@84.261,119.773 ; C25.2@114.605,141.009 115.341,140.273 C26.2@115.341,138.889 ; C7.2@116.781,110.765 C3.2@117.801,110.765 ; C3.2@117.801,110.749 118.781,110.749 C1.2@119.617,111.312 ; C1.2@119.617,111.328 119.617,111.27 R64.2@122.017,111.27
  Top Layer w0.8: C22.2@72.881,122.865 72.957,122.789 75.482,122.789 C16.2@75.481,122.659 75.481,125.059 75.911,125.489 76.235,125.813 U10.1@78.061,125.813 ; U10.1@78.06,125.814 78.06,125.55 pad.4@82.51,121.079
  Top Layer w1: L7.1@80.127,169.581 80.127,170.762 81.118,171.752 90.978,171.752 91.908,170.82 C57.2@91.907,169.741 92.987,169.741 93.557,169.171 93.557,164.261 pad.2@93.547,164.251 ; pad.4@82.511,121.079 82.511,119.648 C2.2@82.583,119.576 ; L5.1@100.161,145.789 100.161,145.839 100.201,145.879 pad.2@101.751,145.879
  Bottom Layer w0.26: v1(95.444,114.029) 95.454,114.039 v1(97.461,114.039)
  Bottom Layer w0.28: v1(87.117,90.928) 87.117,90.969 v1(89.591,90.969)
  Bottom Layer w0.3: v1@79.556,170.871 77.773,170.871 76.742,169.84 76.742,164.511 77.737,163.51 v1@79.647,163.51 ; v1(87.117,90.928) 87.117,88.636 86.412,87.9 86.42,86.292 86.713,85.999 v1(89.281,85.999) ; DEBUG.d@107.261,138.059 107.262,137.968 108.72,136.51 111.18,136.51 114.271,139.599 114.271,139.859 v1(114.301,139.889) ; v1(108.031,82.189) 108.061,82.189 v1(108.061,85.849) ; v1(114.481,137.889) 114.481,134.649 v1(114.441,134.649) 114.441,132.789 v1(114.491,132.739) 114.491,130.779 v1(114.501,130.769) 114.501,128.859 v1(114.491,128.849) 114.491,125.789 v1(114.721,125.559) ; v1(117.941,96.109) 119.761,96.109 v1(119.761,96.159)
  Bottom Layer w0.4: v1(77.201,122.189) 77.201,114.049 84.931,106.317 84.931,90.937 v1(84.968,90.901)
  Bottom Layer w0.5: pad.4@82.511,121.079 82.511,113.459 83.721,112.248 v1(97.041,112.248) 98.182,112.248 101.08,109.35 104.793,109.35 v1@105.256,109.837 ; v1(114.481,137.889) 121.041,137.889 121.721,137.201 121.721,132.719 v1(121.101,132.099)
  Bottom Layer w1: pad.4@82.51,121.079 82.51,143.208 85.182,145.88 pad.2@101.751,145.879 101.75,149.758 93.546,157.963 pad.2@93.547,164.251 ; pad.2@101.751,145.879 112.521,145.879 112.54,145.86 ; v1@114.251,140.169 114.25,141.549 114.25,145.849 112.54,145.849 115.941,145.849 123.081,138.709 123.081,102.177 124.971,100.287 v1(124.971,98.479) ; 123.321,118.569 128.039,118.56 P1.3@128.061,118.539
  other v1: 79.647,163.511
+5V: C19.2 C20.2 C21.2 C24.1 D6.2 DC1.1 P1.1 P1.31 P2.2 P3.20 pad.1 pad.5 R11.1 R73.1 R74.2 U13.3 U13.8 U13.11 U13.20 U13.23 USB2.1 USB2.5 | length 323.5
  Top Layer w0.25: C19.2@89.327,169.671 89.947,169.672 90.396,169.223 90.396,167.33 89.86,166.794 U13.20@89.86,162.719
  Top Layer w0.28: pad.1@85.857,166.21 85.967,166.111 88.362,163.716 U13.23@88.362,162.719 ; C21.2@86.307,154.661 86.427,154.661 87.817,153.271 R73.1@89.337,153.271 89.087,153.521 88.607,153.521 90.557,153.521 91.627,153.521 R11.1@91.897,153.251
  Top Layer w0.3: v1(85.683,160.7) 85.933,160.95 U13.3@87.09,160.95 ; C21.2@86.307,154.661 86.307,155.91 86.797,156.401 87.856,156.401 88.347,156.891 U13.8@88.347,158.719 ; U13.11@89.845,158.719 89.845,157.404 90.376,156.871 91.748,156.871 92.888,155.73 92.888,153.571 92.565,153.251 R11.1@91.897,153.251
  Top Layer w0.6: v1(116.752,80.47) 131.28,80.47 132.329,81.516 132.329,122.278 131.938,122.669 128.697,122.667 P1.1@128.06,121.079 ; 128.061,80.47 P1.31@128.061,82.979
  Top Layer w0.8: R73.1@89.337,153.271 89.497,153.111 90.547,153.111 v1(90.547,152.941) 90.547,153.081 91.897,153.081 R11.1@91.897,153.251
  Top Layer w1: pad.1@78.127,167.051 78.127,167.121 81.197,167.121 81.788,166.502 C20.2@81.789,165.418 ; R74.2@86.307,169.761 87.137,169.761 87.177,169.721 89.277,169.721 C19.2@89.327,169.671 ; pad.5@108.641,171.789 108.69,171.74 D6.2@108.69,169.865
  Top Layer w1.3: 62.812,150.401 72.392,150.401 USB2.5@72.424,150.369 USB2.1@75.025,150.369
  Top Layer w2: 62.86,141.089 63.78,141.089 69.221,135.636 69.221,126.149 P2.2@64.161,121.089 ; 62.861,141.089 62.81,157.825 63.884,158.89 DC1.1@71.885,158.89 ; DC1.1@71.885,158.879 74.771,158.88 75.2,159.309 75.23,159.309 76.381,160.459 76.381,165.306 pad.1@78.126,167.051
  Bottom Layer w0.6: P3.20@111.811,77.999 114.281,77.999 v1(116.752,80.47)
  Bottom Layer w0.8: pad.1@78.127,167.051 85.017,167.051 pad.1@85.857,166.211 ; v1(85.683,160.7) 85.682,158.357 90.516,153.52 v1@90.556,153.52 ; v1@85.687,160.701 85.687,166.21 pad.1@85.857,166.21 ; v1(90.547,152.941) 90.557,152.941 v1@90.557,153.521
  Bottom Layer w1: v1@87.677,169.421 87.717,169.351 87.704,171.752
  Bottom Layer w1.5: pad.1@78.126,167.051 82.865,171.788 124.641,171.788 129.198,167.231 129.231,156.149 128.133,155.067 128.118,121.079 P1.1@128.171,121.079
  other v1: 90.557,153.521 87.677,169.421 87.717,170.031
ADC_3.3V: L1.2 U1.33 | length 7.3
  Top Layer w0.254: L1.2@88.72,96.909 88.72,96.97 90.628,96.97 93.838,100.188 U1.33@94.641,100.189
B1_1: B1.1 D4.1 | length 9.6
  Top Layer w0.3: v1(75.891,89.679) 81.841,95.629 D4.1@82.991,95.629
C32_2: C32.2
C43_1: C43.1
E3.3V: C28.2 C39.2 L5.2 R14.2 R17.2 R34.1 R35.1 R36.1 R38.2 R40.2 R41.2 R42.2 U5.1 U5.9 U5.19 | length 85.7
  Top Layer w0.254: R34.1@92.661,125.889 92.661,125.503 v1(93.096,125.068) ; R36.1@96.581,125.889 96.581,125.647 v1(97.16,125.068)
  Top Layer w0.28: v1(91.967,137.128) 92.274,136.821 U5.1@92.861,136.821 ; R34.1@92.66,125.888 93.221,125.888 93.62,126.289 93.62,128.26 94.621,129.258 U5.9@94.616,133.678
  Top Layer w0.4: v1(96.711,137.859) 101.151,137.859 101.4,137.61 R14.2@101.4,137.089
  Top Layer w0.5: R35.1@90.401,125.869 v1(91.581,125.869) 92.641,125.869 R34.1@92.661,125.889 ; 96.271,137.699 96.371,137.859 v1(96.711,137.859) ; L5.2@100.161,144.389 102.581,144.389 103.79,145.598 112.06,145.598 112.731,146.268 R17.2@112.731,147.019
  Top Layer w0.6: R17.2@112.743,147.043 R38.2@114.772,147.043 v1(114.772,148.095) ; v1(118.172,148.045) 118.201,148.016 R40.2@118.201,147.043 ; v1(121.472,148.045) 121.63,147.887 R42.2@121.63,147.043 ; v1(124.822,148.045) 125.059,147.808 R41.2@125.059,147.043
  Top Layer w0.8: v1(95.516,141.778) 95.522,144.242 95.668,144.389 L5.2@100.161,144.389 ; 97.894,144.389 97.961,144.322 C39.2@97.961,143.673
  Bottom Layer w0.254: v1(93.096,125.068) 93.096,124.814 93.604,124.306 96.652,124.306 97.16,124.814 v1(97.16,125.068)
  Bottom Layer w0.5: 91.918,125.877 91.512,125.877 91.512,137.008 v1(91.967,137.128) 91.966,137.178 92.646,137.859 v1(96.711,137.859) 95.516,137.859 v1(95.516,141.778)
  Bottom Layer w0.6: v1(114.772,148.095) 114.822,148.045 v1(118.172,148.045) v1(121.472,148.045) v1(124.822,148.045)
FB1: R2.1 R4.2 U13.14 | length 7.3
  Top Layer w0.28: U13.14@91.091,159.962 96.398,159.962 R4.2@96.407,159.971 96.407,158.021 R2.1@96.397,158.011
FB2: R7.1 R8.2 U13.5 | length 7.3
  Top Layer w0.28: R8.2@81.789,157.798 R7.1@81.789,159.703 82.038,159.952 U13.5@87.09,159.952
FB3: R5.1 R6.2 U13.2 | length 7.3
  Top Layer w0.28: R5.1@81.789,163.513 81.789,161.608 81.946,161.451 U13.2@87.09,161.451
GND: B1.2 C1.1 C2.1 C3.1 C4.1 C5.1 C6.1 C7.1 C8.1 C9.1 C10.1 C11.1 C12.1 C13.1 C14.1 C15.1 C16.1 C17.1 C18.1 C19.1 C20.1 C21.1 C22.1 C23.1 C24.2 C25.1 C26.1 C27.1 C28.1 C29.2 C30.1 C31.2 C33.2 C34.2 C35.2 C36.2 C37.2 C38.2 C39.1 C40.2 C41.1 C42.2 C46.1 C47.1 C48.1 C49.1 C50.1 C57.1 DC1.2 DC1.3 DEBUG.b LED4.2 P1.2 P1.4 P1.32 P2.1 P2.31 P3.19 R1.1 R4.1 R6.1 R8.1 R37.1 R45.1 R46.1 R47.1 R48.1 R49.1 R51.1 R52.1 R69.1 RJ1.8 RJ1.13 RJ1.14 SW1.1 SW1.2 SW1.3 SW1.4 SW2.1 SW2.2 SW3.1 TF_CARD1.6 TF_CARD1.10 TF_CARD1.11 TF_CARD1.12 TF_CARD1.13 U1.64 U1.95 U1.128 U2.1 U2.2 U3.2 U3.13 U3.23 U3.25 U3.36 U3.48 U4.4 U5.25 U9.1 U10.4 U10.5 U13.1 U13.4 U13.6 U13.13 U13.18 U13.21 U13.25 UART0.1 USB1.0 USB1.5 USB2.0 USB2.4 USB2.8 X1.2 X1.4 X3.2 X3.4 | length 35.2
  Top Layer w0.24: U1.95@108.44,113.588 108.442,113.589 v1(110.081,113.589) ; v1(118.171,150.256) 118.201,150.226 C38.2@118.201,149.456
  Top Layer w0.25: U13.25@89.091,160.706 89.091,161.832 89.36,162.101 89.36,162.201 U13.21@89.36,162.719
  Top Layer w0.254: R37.1@94.721,125.869 94.721,125.856 v1(95.636,124.941)
  Top Layer w0.28: X1.4@85.321,135.909 85.529,136.117 C40.2@85.529,137.828 ; U13.6@87.09,159.452 87.835,159.452 U13.25@89.091,160.706 ; U13.4@87.09,160.452 88.836,160.452 U13.25@89.091,160.706 ; U13.1@87.09,161.951 87.845,161.951 88.475,161.322 U13.25@89.091,160.706 ; C41.1@87.205,132.477 87.205,133.766 X1.2@87.517,134.078 ; U13.13@91.091,159.461 90.335,159.462 U13.25@89.091,160.706 ; U13.18@91.091,161.961 90.514,161.961 v1(89.853,161.3) 89.684,161.3 U13.25@89.091,160.706 ; C46.1@104.081,122.633 105.765,122.633 105.801,122.669 X3.2@105.801,123.009 ; X3.4@108.001,121.409 108.417,121.825 C49.1@109.681,121.825
  Top Layer w0.3: v1(91.781,94.839) 91.801,94.859 C47.1@91.801,95.505 ; C47.1@91.801,95.505 91.801,95.268 92.37,94.699 97.232,94.699 97.641,95.108 C48.1@97.641,95.415 97.641,94.799 v1(97.651,94.789) ; R48.1@91.965,145.78 91.981,145.795 v1(91.981,147.139)
  other v1: 85.979,76.239 85.979,76.899 85.979,77.558 105.371,80.499 106.061,80.529 106.741,80.529 87.14,81.76 97.691,82.409 98.391,82.409 87.14,82.42 99.061,82.419 112.621,85.629 112.601,86.359 94.391,86.989 95.051,86.989 95.711,86.989 86.081,88.669 71.131,89.609 71.651,90.169 94.231,90.379 94.961,90.379 95.681,90.379 122.441,91.159 123.171,91.169 109.461,93.579 110.301,93.599 87.101,94.329 87.761,94.329 88.421,94.329 108.6,96.469 109.44,96.489 110.24,96.509 89.961,100.769 90.661,100.769 89.261,100.789 121.731,108.479 84.721,109.449 83.301,109.469 84.021,109.469 114.761,110.689 115.221,111.189 115.721,111.629 124.141,112.279 124.121,113.029 119.161,116.559 120.071,116.549 84.361,117.629 85.021,117.629 85.681,117.629 108.041,120.509 92.481,121.889 93.091,121.899 93.721,121.909 97.041,122.709 105.781,124.029 89.011,126.079 89.021,127.029 119.951,129.749 125.331,130.879 101.741,131.639 101.051,132.209 89.161,132.309 125.331,132.472 89.141,133.119 125.331,134.066 83.841,134.338 75.261,134.559 76.021,134.569 83.841,135.079 94.467,135.128 95.367,135.128 125.331,135.659 83.841,135.859 94.467,136.028 95.317,136.028 85.481,139.568 85.481,140.309 85.481,141.089 97.461,141.959 98.131,141.959 98.861,141.949 90.091,147.129 113.771,149.439 117.231,149.439 121.631,150.479 112.731,150.619 114.751,150.619 125.031,150.679 121.631,151.179 125.031,151.359 125.051,152.059 88.303,160.25 89.103,160.25 89.853,160.25 88.303,161.3 89.103,161.3
GND1: R1.2 U1.32 | length 5.6
  Top Layer w0.254: R1.2@88.721,98.929 90.581,98.929 U1.32@93.241,101.589
LINK_LED: R45.2 RJ1.12 U5.3 | length 52.9
  Top Layer w0.28: R45.2@90.06,144.38 90.175,144.266 90.175,136.498 90.852,135.82 U5.3@92.861,135.82 ; R45.2@90.06,144.38 90.572,144.381 90.971,144.778 90.971,147.358 91.88,148.267 107.58,148.267 109,149.687 109.002,160.066 110.76,161.816 110.76,166.439 111.344,167.063 RJ1.12@112.406,167.063
LX1: L4.2 U13.12 | length 21.8
  Top Layer w0.28: U13.12@90.345,158.719 91.509,158.72 94.326,155.9 94.326,154.45 94.486,154.45 94.067,154.872 94.067,155.811 91.402,158.476 U13.12@90.406,158.476 ; U13.12@90.485,158.956 91.626,158.956 94.557,156.02 94.557,153.513 L4.2@94.486,154.453
LX2: L2.2 U13.7 | length 20.4
  Top Layer w0.3: L2.2@83.731,154.737 83.731,156.518 86.139,158.925 87.681,158.925 ; L2.2@83.843,154.318 84.138,154.318 84.138,156.302 86.34,158.504 U13.7@87.793,158.504 ; L2.2@83.897,154.531 83.896,156.411 86.205,158.72 U13.7@87.846,158.719
LX3: L7.2 U13.24 | length 29.3
  Top Layer w0.28: L7.2@84.102,169.558 83.706,169.558 83.706,165.141 86.355,162.471 87.704,162.471 U13.24@87.861,162.719 86.447,162.718 83.937,165.248 83.937,169.736 L7.2@84.26,169.736 ; L7.2@84.237,169.959 84.186,169.959 84.186,165.347 86.533,162.982 87.839,162.982 U13.24@87.839,162.941
P1_29: P1.29
P3_18: P3.18
PA0: P2.9 U1.2 | length 33.8
  Top Layer w0.254: P2.9@61.621,110.929 62.86,109.69 67.123,109.69 71.016,113.589 U1.2@93.241,113.588
PA1: P2.12 U1.3 | length 31.8
  Top Layer w0.254: P2.12@63.831,108.179 66.701,108.179 71.692,113.17 U1.3@93.582,113.17
PA2: P2.11 U1.4 | length 34.5
  Top Layer w0.254: P2.11@61.621,108.389 62.853,107.158 66.681,107.158 72.312,112.791 U1.4@93.241,112.79
PA3: P2.14 U1.5 | length 31.8
  Top Layer w0.254: P2.14@64.161,105.849 66.422,105.849 72.962,112.39 U1.5@93.241,112.389
PA4: P2.13 U1.6 | length 35.2
  Top Layer w0.254: P2.13@61.621,105.849 62.883,104.59 66.013,104.59 73.452,111.991 U1.6@93.241,111.99
PA5: P2.16 U1.7 | length 32.5
  Top Layer w0.254: P2.16@64.161,103.309 65.71,103.309 73.988,111.587 U1.7@93.241,111.589
PA6: P2.15 U1.8 | length 35.9
  Top Layer w0.254: P2.15@61.621,103.309 62.901,102.029 65.319,102.029 74.473,111.176 U1.8@93.241,111.19
PA7: P2.18 U1.14 | length 32.4
  Top Layer w0.254: P2.18@64.161,100.769 64.971,100.769 72.993,108.791 U1.14@93.241,108.79
PA8: P2.17 U1.15 | length 35.8
  Top Layer w0.254: P2.17@61.621,100.769 62.911,99.479 64.57,99.479 73.483,108.389 U1.15@93.241,108.388
PA9: P2.20 U1.16 | length 33.2
  Top Layer w0.254: P2.20@64.161,98.229 64.11,98.229 73.871,107.991 U1.16@93.241,107.989
PA10: P2.19 U1.17 | length 37.6
  Top Layer w0.254: P2.19@61.621,98.229 62.921,96.929 65.301,96.929 65.903,97.531 65.893,99.192 74.303,107.589 U1.17@93.241,107.588
PA11: P2.22 U1.18 | length 35.2
  Top Layer w0.254: P2.22@64.161,95.689 65.512,95.689 66.48,96.665 66.48,98.9 74.727,107.191 U1.18@93.241,107.189
PA12: P2.21 U1.19 | length 38.7
  Top Layer w0.254: P2.21@61.601,95.689 61.799,95.689 62.848,94.579 65.583,94.574 66.983,95.966 66.98,98.605 75.223,106.789 U1.19@93.241,106.788
PB0: P2.32 U1.29 | length 38.8
  Top Layer w0.254: P2.32@64.161,82.989 64.931,82.989 67.796,85.852 67.788,88.458 72.088,92.763 73.518,92.766 83.541,102.789 U1.29@93.241,102.788
PB1: P1.26 U1.36 | length 42.9
  Top Layer w0.2: v1@94.72,98.069 95.84,99.187 U1.36@95.84,100.188
  Bottom Layer w0.2: v1(94.681,98.009) 94.682,97.508 95.162,97.028 97.521,97.028 98.641,98.148 120.071,98.148 126.401,91.819 129.491,91.819 P1.26@130.711,90.599
PB2: P1.24 U1.38 | length 39.6
  Top Layer w0.2: v1@96.341,98.069 96.64,98.368 U1.38@96.64,100.189
  Bottom Layer w0.2: v1(96.361,98.029) 96.874,98.029 97.973,99.19 120.625,99.19 125.38,94.356 129.37,94.359 130.6,93.139 P1.24@130.711,93.139
PB3: P1.23 U1.37 | length 38.4
  Top Layer w0.2: v1@95.56,98.069 95.56,98.229 96.241,98.908 U1.37@96.241,100.188
  Bottom Layer w0.2: v1@95.54,98.008 95.54,97.569 95.7,97.409 97.041,97.409 98.321,98.689 120.27,98.689 125.822,93.139 P1.23@128.171,93.139
  other v1: 95.541,98.009
PB4: P3.1 U1.31 | length 39
  Top Layer w0.254: v1(82.351,98.779) 85.563,101.991 U1.31@93.241,101.99
  Bottom Layer w0.3: v1(82.351,98.779) 82.351,86.769 83.901,85.219 83.901,80.919 87.371,77.449 87.371,75.809 87.721,75.459 P3.1@88.951,75.459
PB5: P1.25 U1.35 | length 41.6
  Top Layer w0.2: v1(93.761,98.189) 93.761,98.289 93.981,98.509 94.081,98.609 94.701,98.609 95.441,99.349 U1.35@95.441,100.189
  Bottom Layer w0.2: v1@93.76,98.189 93.76,97.63 94.161,97.208 94.682,96.688 98.161,96.688 99,97.528 119.99,97.528 126.922,90.599 P1.25@128.171,90.599